# EAGLE board mega32u2-mit-dds (EAGLE 7.1.0)
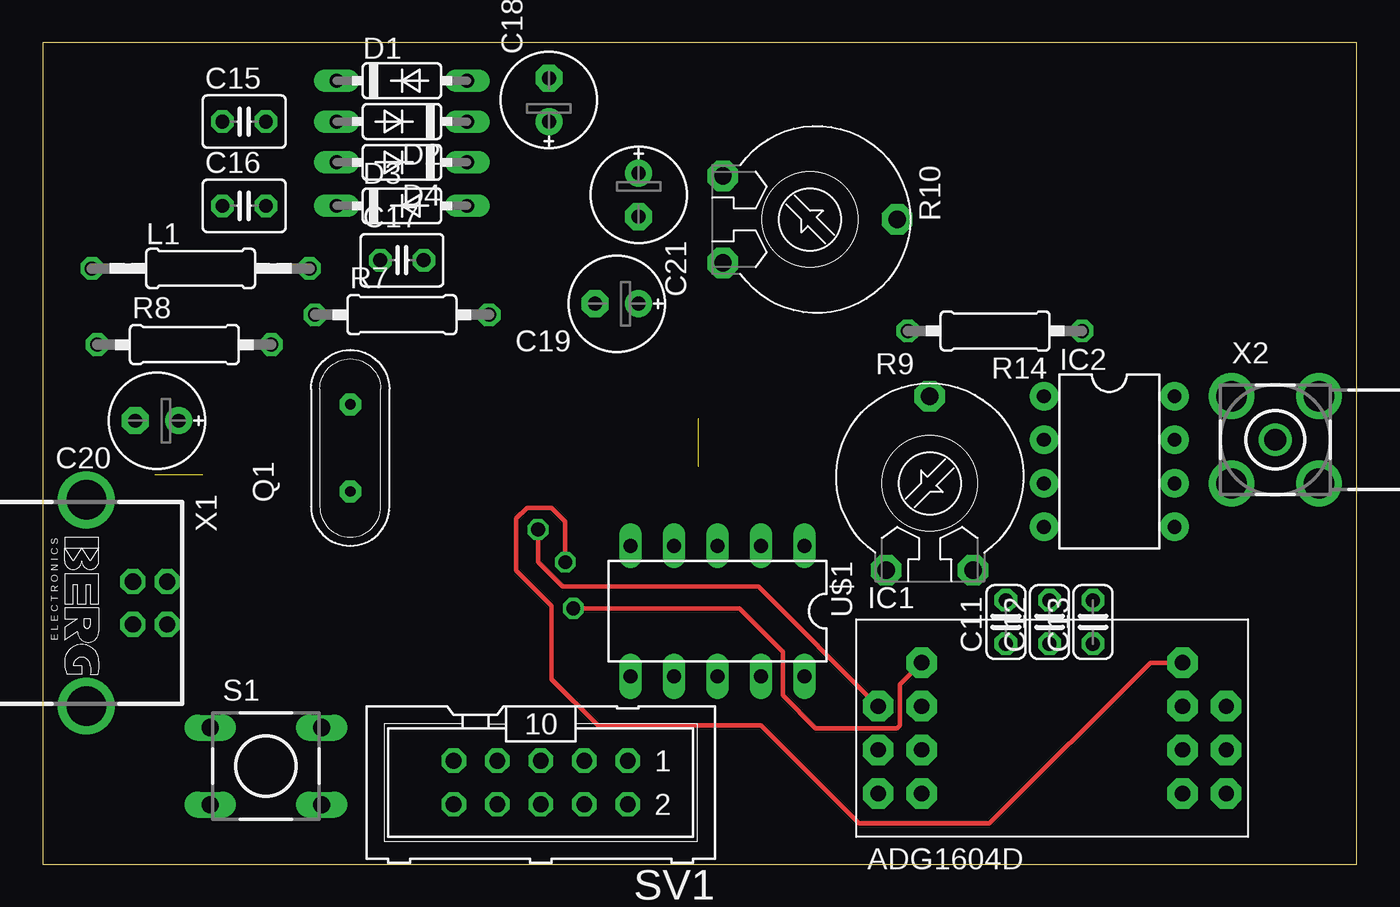
[diagram p0: board, top side]
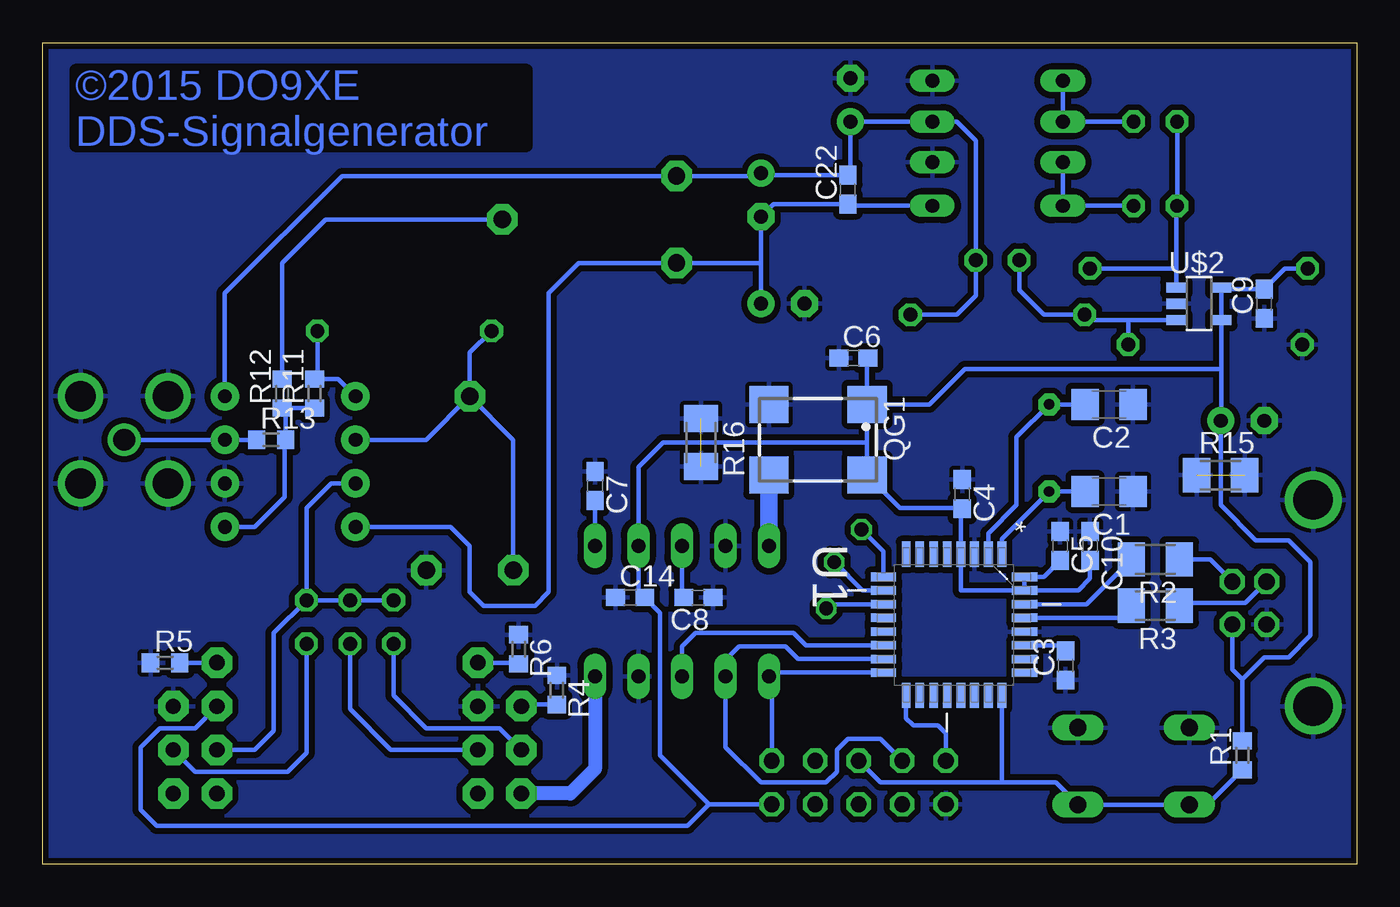
[diagram p1: board, bottom side, seen from below]

Size 76.66 x 47.93 mm. Coordinates in mm from the lower left corner, seen from the top.
Outline: 0,0 76.66,0 76.66,47.93 0,47.93 0,0
Copper layers (1*16): Top 0.035mm / dielectric 1.5mm / Bottom 0.035mm
Design rules "default *": minimum track width 10mil, minimum drill 24mil, track to track 8mil, track to pad 8mil, pad to pad 8mil, via to via 8mil, smd to smd 8mil, copper to edge 10mil, drill to drill 8mil, minimum pad ring 10mil, minimum via ring 8mil, stop-mask expansion 4mil, vias tented up to drill 0mil, thermal gap 10mil

## Footprints (pad centres in the part's own frame; a part is rotated, then mirrored left to right if it is on the bottom)
C1206 = smd 1.6 x 1.8: 1 -1.4,0; 2 1.4,0
C0603 = smd 1.1 x 1: 1 -0.85,0; 2 0.85,0
C025-024X044 = drill 0.813 octagon: 1 -1.27,0; 2 1.27,0
C025-030X050 = drill 0.813 octagon: 1 -1.27,0; 2 1.27,0
E2,5-6E = drill 0.813 pad 1.575: + -1.27,0 | drill 0.813 pad 1.575 octagon: - 1.27,0
DO35-7 = drill 0.813 long: A 3.81,0; C -3.81,0
DIL2-14 = drill 0.9 pad 1.778 octagon: P$1 -7.62,3.81; P$2 -10.16,1.27; P$3 -7.62,1.27; P$4 -10.16,-1.27; P$5 -7.62,-1.27; P$6 -10.16,-3.81; P$7 -7.62,-3.81; P$8 7.62,-3.81; P$9 10.16,-3.81; P$10 7.62,-1.27; P$11 10.16,-1.27; P$12 7.62,1.27; P$13 10.16,1.27; P$14 7.62,3.81
DIL08 = drill 0.813 pad 1.676: 1 -3.81,-3.81; 2 -1.27,-3.81; 3 1.27,-3.81; 4 3.81,-3.81; 5 3.81,3.81; 6 1.27,3.81; 7 -1.27,3.81; 8 -3.81,3.81
0207/12 = drill 0.813 octagon: 1 -6.35,0; 2 6.35,0
QS = drill 0.61 pad 1.27 octagon: 1 -2.54,0; 2 2.54,0
SM77H-G = smd 2.286 x 2.159: 1 -2.868,-2.059; 2 2.868,-2.059; 3 2.868,2.059; 4 -2.868,2.059
R0603 = smd 1 x 1.1: 1 -0.85,0; 2 0.85,0
M1206 = smd 1.6 x 2: 1 -1.4,0; 2 1.4,0
0207/10 = drill 0.813 octagon: 1 -5.08,0; 2 5.08,0
PT-10 = drill 1.016 pad 1.778 octagon: 1 -2.54,-5.08; 2 2.54,-5.08; 3 0,5.08
DTS-6 = drill 1 long: 1 -3.25,2.25; 2 3.25,2.25; 3 -3.25,-2.25; 4 3.25,-2.25
ML10 = drill 0.914 octagon: 1 -5.08,-1.27; 2 -5.08,1.27; 3 -2.54,-1.27; 4 -2.54,1.27; 5 0,-1.27; 6 0,1.27; 7 2.54,-1.27; 8 2.54,1.27; 9 5.08,-1.27; 10 5.08,1.27
QFP80P900X900X120-32N = smd 1.473 x 0.508: 1 -4.115,2.794; 2 -4.115,2.007; 3 -4.115,1.194; 4 -4.115,0.406; 5 -4.115,-0.406; 6 -4.115,-1.194; 7 -4.115,-2.007; 8 -4.115,-2.794; 17 4.115,-2.794; 18 4.115,-2.007; 19 4.115,-1.194; 20 4.115,-0.406; 21 4.115,0.406; 22 4.115,1.194; 23 4.115,2.007; 24 4.115,2.794 | smd 0.508 x 1.473: 9 -2.794,-4.115; 10 -2.007,-4.115; 11 -1.194,-4.115; 12 -0.406,-4.115; 13 0.406,-4.115; 14 1.194,-4.115; 15 2.007,-4.115; 16 2.794,-4.115; 25 2.794,4.115; 26 2.007,4.115; 27 1.194,4.115; 28 0.406,4.115; 29 -0.406,4.115; 30 -1.194,4.115; 31 -2.007,4.115; 32 -2.794,4.115
DIL10 = drill 0.813 long: 1 -5.08,-3.81; 2 -2.54,-3.81; 3 0,-3.81; 4 2.54,-3.81; 5 5.08,-3.81; 6 5.08,3.81; 7 2.54,3.81; 8 0,3.81; 9 -2.54,3.81; 10 -5.08,3.81
SOT23-5 = smd 0.6 x 1.2: 1 -0.95,-1.306; 2 0,-1.306; 3 0.95,-1.306; 4 0.95,1.306; 5 -0.95,1.306
PN61729-S = drill 0.95 octagon: 1 1.25,4.71; 2 -1.25,4.71; 3 -1.25,2.71; 4 1.25,2.71 | drill 2.3 pad 2.9: S1 -6.02,0; S2 6.02,0
BU-SMA-H = drill 1.27: 1 0,0 | drill 1.778: 2 -2.55,2.55; 3 2.55,2.55; 4 2.55,-2.55; 5 -2.55,-2.55

## Placement (x,y rotation side)
C1  22n  [C1206]  14.45,21.75 180 bottom
C2  22n  [C1206]  14.45,26.83 180 bottom
C3  100n  [C0603]  16.99,11.59 90 bottom
C4  100n  [C0603]  23.02,21.59 270 bottom
C5  100n  [C0603]  17.3,18.57 270 bottom
C6  100n  [C0603]  29.37,29.53 0 bottom
C7  100n  [C0603]  44.45,22.07 270 bottom
C8  100n  [C0603]  38.42,15.56 180 bottom
C9  100n  [C0603]  5.4,32.7 90 bottom
C10  100n  [C0603]  15.56,18.57 270 bottom
C11  [C025-024X044]  56.2,14.13 90 top
C12  [C025-024X044]  58.74,14.13 90 top
C13  [C025-024X044]  61.28,14.13 90 top
C14  100n  [C0603]  42.39,15.56 0 bottom
C15  [C025-030X050]  11.75,43.34 0 top
C16  [C025-030X050]  11.75,38.42 0 top
C17  [C025-030X050]  20.95,35.24 0 top
C18  [E2,5-6E]  29.53,44.61 90 top
C19  [E2,5-6E]  33.5,32.7 180 top
C20  [E2,5-6E]  6.67,25.88 180 top
C21  [E2,5-6E]  34.77,39.05 270 top
C22  100n  [C0603]  29.69,39.37 90 bottom
D1  [DO35-7]  20.95,45.72 0 top
D2  [DO35-7]  20.95,43.34 180 top
D3  [DO35-7]  20.95,38.42 0 top
D4  [DO35-7]  20.95,40.96 180 top
IC1  ADG1604D  [DIL2-14]  58.9,7.94 0 top
IC2  NE5532N  [DIL08]  62.23,23.5 270 top
L1  [0207/12]  9.21,34.77 0 top
Q1  [QS]  17.94,24.29 90 top
QG1  SM77HG  [SM77H-G]  31.43,24.77 180 bottom
R1  10k  [R0603]  6.67,6.35 90 bottom
R2  22R  [M1206]  11.75,17.78 180 bottom
R3  22R  [M1206]  11.75,15.08 180 bottom
R4  10k  [R0603]  46.67,10.16 270 bottom
R5  10k  [R0603]  69.53,11.75 0 bottom
R6  10k  [R0603]  48.9,12.54 270 bottom
R7  2M  [0207/10]  20.95,32.07 0 top
R8  220k  [0207/10]  8.26,30.32 0 top
R9  100k  [PT-10]  51.75,22.23 0 top
R10  [PT-10]  44.77,37.62 270 top
R11  10k  [R0603]  60.8,27.46 90 bottom
R12  10k  [R0603]  62.71,27.46 90 bottom
R13  10k  [R0603]  63.34,24.77 0 bottom
R14  100k  [0207/10]  55.56,31.11 180 top
R15  [M1206]  7.94,22.7 0 bottom
R16  0  [M1206]  38.26,24.61 270 bottom
S1  DTS-6  [DTS-6]  13.02,5.71 0 top
SV1  [ML10]  29.05,4.76 180 top
U1  ATMEGA32U2-AU  [QFP80P900X900X120-32N]  23.5,13.97 270 bottom
U$1  AD9833-P  [DIL10]  39.37,14.76 180 top
U$2  LT1615  [SOT23-5]  9.21,32.7 270 bottom
X1  PN61729-S  [PN61729-S]  2.54,15.24 270 top
X2  BU-SMA-H  [BU-SMA-H]  71.91,24.77 0 top

## Library data of the parts
C1-C22 L1 R1-R16 = rcl
D1-D4 = diode
IC1 U$1 = analog-devices
IC2 U$2 = linear
Q1 = special
QG1 = crystal
S1 = switch-tact
SV1 = con-harting-ml; OC_FARNELL: unknown; OC_NEWARK: unknown
U1 = Atmel-ATMEGA32U2-AU; DESCRIPTION: 8-bit Microcontroller with ISP Flash and USB Controller; MPN: ATMEGA32U2-AU; OC_FARNELL: 1748524; OC_NEWARK: 26R5632; PACKAGE: TQFP-32; SUPPLIER: Atmel
X1 = con-berg; OC_FARNELL: unknown; OC_NEWARK: unknown
X2 = con-coax; OC_FARNELL: unknown; OC_NEWARK: unknown

## Nets
GND: C1.1 C2.1 C3.1 C4.1 C5.1 C6.1 C7.1 C8.1 C9.1 C10.1 C14.1 C18.- C19.- C20.- D1.A D4.C IC1.P$3 IC1.P$13 IC2.6 QG1.2 R4.1 R5.1 R6.1 R8.1 R9.2 R15.1 R15.2 R16.1 R16.2 S1.1 S1.2 SV1.10 U1.3 U1.28 U$1.4 U$1.9 U$2.2 X1.4 X1.S1 X1.S2 X2.2 X2.3 X2.4 X2.5
N$1: C2.2 Q1.2 U1.2
N$2: C1.2 Q1.1 U1.1
N$3: SV1.9 U1.17
N$4: SV1.1 U1.16 U$1.6
N$5: R2.2 U1.30
N$6: R3.2 U1.29
N$7: C3.2 U1.27
N$8: R1.1 S1.3 S1.4 SV1.5 U1.24
N$9: SV1.7 U1.15 U$1.7
N$10: U1.14 U$1.8
N$11: C8.2 U$1.3
N$12: C7.2 U$1.1
N$13: R3.1 X1.3
N$14: R2.1 X1.2
N$15: QG1.3 U$1.5
N$16: IC1.P$6 U$1.10
N$17: C13.1 IC1.P$11
N$18: C12.1 IC1.P$5
N$19: C11.1 IC1.P$4
N$20: C11.2 C12.2 C13.2 IC1.P$10 IC2.3
N$21: IC1.P$2 R4.2 U1.9
N$22: IC1.P$14 R5.2 U1.10
N$23: IC1.P$1 R6.2 U1.11
N$24: C15.2 D1.C D2.A
N$25: C15.1 C16.1 L1.2 U$2.1
N$26: C16.2 D3.C D4.A
N$27: C17.1 R7.1 R8.2 U$2.3
N$29: C17.2 C18.+ C21.+ C22.2 D2.C IC2.8 R7.2 R10.1
N$31: C19.+ C21.- C22.1 D3.A IC2.4 R10.2
N$32: IC2.5 R11.1 R12.1 R13.2
N$33: R10.3 R12.2
N$34: IC2.2 R9.1 R9.3 R14.2
N$35: IC2.1 R11.2 R14.1
N$36: IC2.7 R13.1 X2.1
VCC: C4.2 C5.2 C6.2 C9.2 C10.2 C14.2 C20.+ IC1.P$12 L1.1 QG1.1 QG1.4 R1.2 SV1.2 U1.4 U1.31 U1.32 U$1.2 U$2.4 U$2.5 X1.1

## Tracks (layer width: path | path; a pad name or v marks a point on that pad's centre or on a via)
GND  (2 unrouted)
  pour Bottom (isolate 0.356): 0,0 76.68,0 76.68,47.94 0,47.94
N$1
  Bottom 0.254: C2.2 Q1.2 19.84,24.92 19.84,20.95 21.49,19.31 U1.2
N$2
  Bottom 0.254: C1.2 Q1.1 20.7,18.99 U1.1
N$3
  Bottom 0.254: U1.17 26.29,8.51 25.88,8.1 24.45,8.1 23.97,7.62 SV1.9
N$4
  Bottom 0.254: U1.16 34.07,11.18 U$1.6 arc90 34.13,10.79 SV1.1
N$5
  Bottom 0.254: U1.30 15.76,15.16 R2.2
N$6
  Bottom 0.254: U1.29 13.85,14.38 arc-90 R3.2
N$7
  Bottom 0.254: U1.27 17.32,12.78 C3.2
N$8
  Bottom 0.254: 20.7,4.76 27.78,4.76 SV1.5 | U1.24 20.7,4.76 | 20.7,4.76 17.57,4.76 S1.4 S1.3 8.7,3.46 R1.1
N$9
  Bottom 0.254: SV1.7 27.78,7.3 29.69,7.3 30.32,6.67 30.32,5.4 30.96,4.76 34.77,4.76 36.83,6.83 U$1.7 36.83,11.91 36.04,12.7 33.34,12.7 32.6,11.96 U1.15
N$10
  Bottom 0.254: U1.14 32.14,12.78 32.86,13.49 38.58,13.49 39.37,12.7 U$1.8
N$11
  Bottom 0.254: C8.2 39.37,15.66 U$1.3
N$12
  Bottom 0.254: U$1.1 C7.2
N$13
  Bottom 0.254: X1.3 6.5,15.24 10.19,15.24 arc-90 R3.1
N$14
  Bottom 0.254: X1.2 8.54,17.78 R2.1
N$15
  Bottom 1.016: QG1.3 34.29,22.7 U$1.5
N$16
  Bottom 0.813: U$1.10 44.45,5.56 45.88,4.13 IC1.P$6
N$17
  Bottom 0.254: IC1.P$11 67.79,5.4 62.39,5.4 61.28,6.51 C13.1
N$18
  Bottom 0.254: IC1.P$5 56.36,6.67 58.74,9.05 C12.1
N$19
  Bottom 0.254: IC1.P$4 50.01,7.94 54.29,7.94 56.2,9.84 C11.1
N$20
  Bottom 0.254: IC1.P$10 64.29,6.67 63.18,7.78 63.18,13.49 C13.2 | C13.2 C12.2 C11.2 | IC2.3 59.85,22.23 61.28,20.8 C13.2
N$21  (via drill 0.8)
  Top 0.254: v28.89,19.53 28.89,17.62 30.32,16.19 41.75,16.19 IC1.P$2
  Bottom 0.254: R4.2 48.63,9.31 IC1.P$2 | U1.9 27.61,18.24 v28.89,19.53
N$22  (via drill 0.8)
  Top 0.254: v30.48,17.62 30.48,20 29.69,20.8 28.26,20.8 27.62,20.16 27.62,17.14 29.69,15.08 29.69,10.79 32.38,8.1 41.91,8.1 47.62,2.38 55.24,2.38 64.61,11.75 IC1.P$14
  Bottom 0.254: R5.2 IC1.P$14 | U1.10 28.84,15.98 v30.48,17.62
N$23  (via drill 0.8)
  Top 0.254: v30.96,14.92 40.64,14.92 43.18,12.38 43.18,9.84 45.09,7.94 49.85,7.94 50.01,8.1 50.01,10.48 IC1.P$1
  Bottom 0.254: IC1.P$1 48.95,11.75 R6.2 | U1.11 30.71,15.16 v30.96,14.92
N$24
  Bottom 0.254: C15.2 D2.A D1.C
N$25
  Bottom 0.254: U$2.1 10.51,34.77 | 10.51,34.77 10.51,38.38 C16.1 C15.1 | L1.2 10.51,34.77
N$26
  Bottom 0.254: D4.A D3.C C16.2
N$27
  Bottom 0.254: U$2.3 13.34,31.75 | 13.34,31.75 15.56,31.75 R7.1 18.26,32.07 19.68,33.5 C17.1 | R8.2 13.34,31.75
N$29
  Bottom 0.254: R7.2 23.34,32.07 22.23,33.18 C17.2 22.23,42.23 23.34,43.34 D2.C C18.+ 29.53,40.38 C22.2 34.66,40.22 C21.+ 34.92,40.16 R10.1 59.21,40.16 66.04,33.34 IC2.8
N$31
  Bottom 0.254: C19.+ 34.77,35.08 | 34.77,35.08 C21.- 34.03,38.52 C22.1 29.58,38.42 D3.A | 34.77,35.08 R10.2 45.4,35.08 47.15,33.34 47.15,15.88 47.94,15.08 50.96,15.08 51.75,15.88 51.75,18.57 52.86,19.68 IC2.4
N$32
  Bottom 0.254: R11.1 R12.1 62.49,26.4 R13.2 62.55,24.71 62.55,21.43 64.29,19.68 IC2.5
N$33
  Bottom 0.254: R12.2 62.71,35.08 60.17,37.62 R10.3
N$34
  Bottom 0.254: R9.1 49.21,24.77 R9.3 | IC2.2 54.29,24.77 R9.3 | R14.2 51.75,29.84 R9.3
N$35
  Bottom 0.254: IC2.1 59.43,28.31 R11.2 60.64,28.47 R14.1
N$36
  Bottom 0.254: R13.1 IC2.7 X2.1
VCC
  Bottom 0.254: SV1.2 37.78,3.49 | 37.78,3.49 40.64,6.35 40.64,14.66 C14.2 41.91,15.93 U$1.2 41.91,23.18 40.48,24.61 28.57,24.61 | U1.31 16.25,15.98 15.56,16.67 C10.2 | C5.2 18.26,16.76 U1.32 U1.31 | U1.31 23.09,15.98 U1.4 23.09,20.8 | 23.09,20.8 C4.2 | R1.2 6.67,10.79 | 23.09,20.8 26.66,20.8 QG1.4 28.57,24.61 | 28.57,24.61 QG1.1 | QG1.1 28.57,29.48 C6.2 | 6.67,10.79 5.4,12.06 3.97,12.06 2.7,13.34 2.7,17.62 3.97,18.89 5.87,18.89 7.94,20.95 C20.+ 7.9,25.91 7.9,28.89 | L1.1 4.18,34.77 C9.2 7.8,33.55 U$2.5 U$2.4 7.9,28.89 | IC1.P$12 67.79,7.94 69.85,7.94 70.96,6.83 70.96,3.17 70.01,2.22 39.05,2.22 37.78,3.49 | 7.9,28.89 22.86,28.89 24.92,26.83 QG1.1 | X1.1 7.25,11.38 6.67,10.79

## Text on the board
Bottom: ©2015 DO9XE / DDS-Signalgenerator